# EAGLE board stereo-mix (EAGLE 9.1.0)
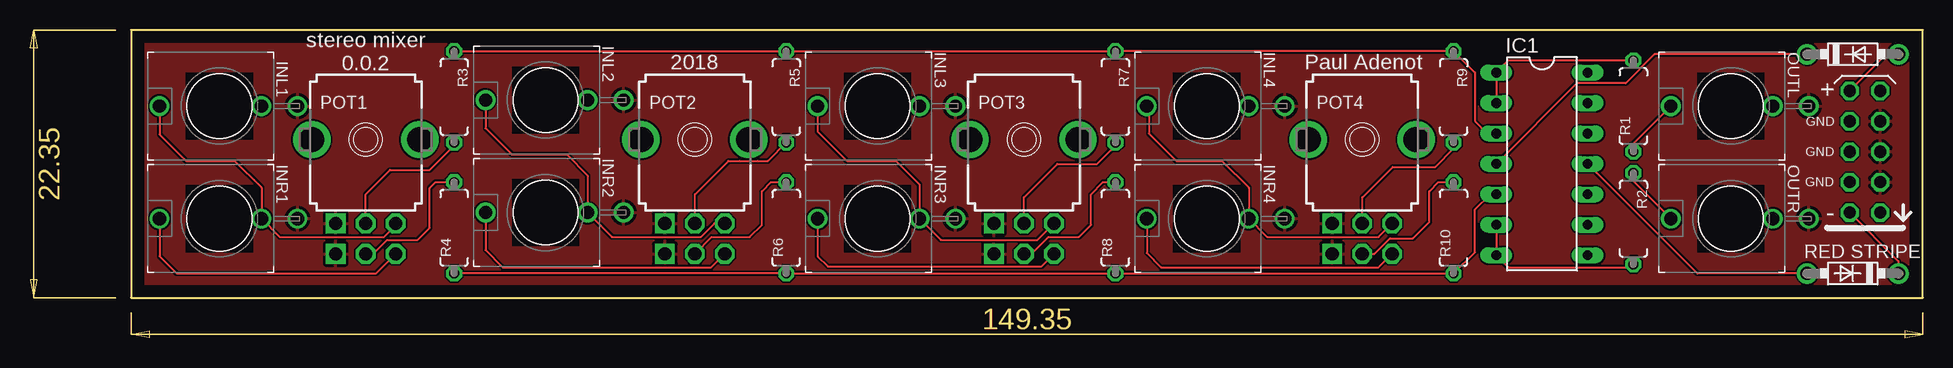
[diagram p0: board, top side]

Size 149.35 x 22.35 mm. Coordinates in mm from the lower left corner, seen from the top.
Outline: 0,0 149.35,0 149.35,22.35 0,22.35 0,0
Copper layers (1*16): Top 0.035mm / dielectric 1.5mm / Bottom 0.035mm
Design rules "default": minimum track width 6mil, minimum drill 0.35mm, track to track 6mil, track to pad 6mil, pad to pad 6mil, via to via 6mil, smd to smd 6mil, copper to edge 40mil, drill to drill 6mil, minimum pad ring 10mil, minimum via ring 8mil, stop-mask expansion 4mil, vias tented up to drill 0mil, thermal gap 10mil

## Footprints (pad centres in the part's own frame; a part is rotated, then mirrored left to right if it is on the bottom)
DO41-7.6 = drill 1.1 pad 1.7: A 3.81,0; C -3.81,0
DIL14 = drill 0.813 long: 1 -7.62,-3.81; 2 -5.08,-3.81; 3 -2.54,-3.81; 4 0,-3.81; 5 2.54,-3.81; 6 5.08,-3.81; 7 7.62,-3.81; 8 7.62,3.81; 9 5.08,3.81; 10 2.54,3.81; 11 0,3.81; 12 -2.54,3.81; 13 -5.08,3.81; 14 -7.62,3.81
WQP-PJ301M-12_JACK = drill 1.1: P$1_TIP 0,5; P$2_SWITCH 0,-3.5; P$3_SLEEVE 0,-6.5
DUAL_9MM_SNAP-IN_POT = drill 1.1 square: 1 -2.5,-7; 1B -2.5,-9.54 | drill 1.1 octagon: 2 0,-7; 2B 0,-9.54; 3 2.5,-7; 3B 2.5,-9.54 | drill 2.1 pad 2.54: CHASSIS1 -4.5,0; CHASSIS2 4.5,0
7MM_RESISTOR = drill 0.813 octagon: 1 -3.81,0; 2 3.81,0
EURO_POWER_HEADER = drill 1.016 octagon: 1 -5.08,-1.27; 2 -5.08,1.27; 3 -2.54,-1.27; 4 -2.54,1.27; 5 0,-1.27; 6 0,1.27; 7 2.54,-1.27; 8 2.54,1.27; 9 5.08,-1.27; 10 5.08,1.27

## Placement (x,y rotation side)
D1  [DO41-7.6]  143.51,20.32 0 top
D2  [DO41-7.6]  143.51,2.03 180 top
IC1  [DIL14]  117.6,11.18 270 top
INL1  THONKICONNNEW  [WQP-PJ301M-12_JACK]  7.37,16 90 top
INL2  THONKICONNNEW  [WQP-PJ301M-12_JACK]  34.54,16.51 90 top
INL3  THONKICONNNEW  [WQP-PJ301M-12_JACK]  62.23,16 90 top
INL4  THONKICONNNEW  [WQP-PJ301M-12_JACK]  89.66,16 90 top
INR1  THONKICONNNEW  [WQP-PJ301M-12_JACK]  7.37,6.6 90 top
INR2  THONKICONNNEW  [WQP-PJ301M-12_JACK]  34.54,7.11 90 top
INR3  THONKICONNNEW  [WQP-PJ301M-12_JACK]  62.23,6.6 90 top
INR4  THONKICONNNEW  [WQP-PJ301M-12_JACK]  89.66,6.6 90 top
OUTL  THONKICONNNEW  [WQP-PJ301M-12_JACK]  133.35,16 90 top
OUTR  THONKICONNNEW  [WQP-PJ301M-12_JACK]  133.35,6.6 90 top
POT1  10k  [DUAL_9MM_SNAP-IN_POT]  19.56,13.21 0 top
POT2  10k  [DUAL_9MM_SNAP-IN_POT]  46.99,13.21 0 top
POT3  10k  [DUAL_9MM_SNAP-IN_POT]  74.42,13.21 0 top
POT4  10k  [DUAL_9MM_SNAP-IN_POT]  102.62,13.21 0 top
R1  1k  [7MM_RESISTOR]  125.22,16 90 top
R2  1k  [7MM_RESISTOR]  125.22,6.6 270 top
R3  1k  [7MM_RESISTOR]  26.92,16.76 270 top
R4  1k  [7MM_RESISTOR]  26.92,5.84 90 top
R5  1k  [7MM_RESISTOR]  54.61,16.76 270 top
R6  1k  [7MM_RESISTOR]  54.61,5.84 90 top
R7  1k  [7MM_RESISTOR]  82.04,16.76 270 top
R8  1k  [7MM_RESISTOR]  82.04,5.84 90 top
R9  1k  [7MM_RESISTOR]  110.24,16.76 270 top
R10  1k  [7MM_RESISTOR]  110.24,5.84 90 top
SV1  EURO_POWER_HEADERREGULAR  [EURO_POWER_HEADER]  144.53,12.19 90 top

## Library data of the parts
D1 D2 = diode
IC1 = linear
INL1-INL4 INR1-INR4 OUTL OUTR POT1-POT4 R1-R10 SV1 = MusicThingModular

## Nets
GND: INL1.P$3_SLEEVE INL2.P$3_SLEEVE INL3.P$3_SLEEVE INL4.P$3_SLEEVE INR1.P$3_SLEEVE INR2.P$3_SLEEVE INR3.P$3_SLEEVE INR4.P$3_SLEEVE OUTL.P$3_SLEEVE OUTR.P$3_SLEEVE POT1.1 POT1.1B POT2.1 POT2.1B POT3.1 POT3.1B POT4.1 POT4.1B SV1.3 SV1.5 SV1.7
N$1: POT1.2B R4.2
N$2: POT1.2 R3.2
N$3: POT2.2 R5.2
N$4: POT2.2B R6.2
N$5: POT3.2 R7.2
N$6: OUTL.P$1_TIP R1.1
N$7: POT3.2B R8.2
N$8: POT4.2 R9.2
N$9: POT4.2B R10.2
N$10: D2.C SV1.2
N$11: INR1.P$1_TIP POT1.3B
N$12: INL2.P$1_TIP INR2.P$2_SWITCH POT2.3
N$13: INR2.P$1_TIP POT2.3B
N$14: D1.A SV1.10
N$15: INR3.P$1_TIP POT3.3B
N$18: INR4.P$1_TIP POT4.3B
N$20: OUTR.P$1_TIP R2.1
N$25: INL1.P$1_TIP INR1.P$2_SWITCH POT1.3
N$27: IC1.6 IC1.7 R2.2
N$29: IC1.1 IC1.2 R1.2
N$40: INL3.P$1_TIP INR3.P$2_SWITCH POT3.3
N$45: INL4.P$1_TIP INR4.P$2_SWITCH POT4.3
N$47: IC1.3 R3.1 R5.1 R7.1 R9.1
N$48: IC1.5 R4.1 R6.1 R8.1 R10.1
VCC: D1.C IC1.4
VEE: D2.A IC1.11

## Tracks (layer width: path | path; a pad name or v marks a point on that pad's centre or on a via)
GND
  pour Top: 0,22.35 0,0.25 149.35,0.25 149.35,22.35
N$1
  Top 0.152: POT1.2B 20.18,3.67 21.34,4.83 23.88,4.83 24.89,5.84 24.89,9.14 25.4,9.65 R4.2
N$2
  Top 0.152: POT1.2 19.56,8.64 21.59,10.67 24.89,10.67 26.92,12.7 R3.2
N$3
  Top 0.152: POT2.2 46.99,8.64 49.78,11.43 50.74,11.43 50.75,11.42 52.23,11.42 52.24,11.43 53.09,11.43 R5.2
N$4
  Top 0.152: POT2.2B 48.4,5.08 51.56,5.08 52.58,6.1 52.58,8.89 53.34,9.65 R6.2
N$5
  Top 0.152: POT3.2 74.42,8.38 77.22,11.18 80.52,11.18 82.04,12.7 R7.2
N$6
  Top 0.152: R1.1 125.22,12.87 OUTL.P$1_TIP
N$7
  Top 0.152: POT3.2B 75.04,3.67 76.45,5.08 78.99,5.08 80.01,6.1 80.01,8.64 81.03,9.65 R8.2
N$8
  Top 0.152: POT4.2 102.62,8.38 105.16,10.92 108.71,10.92 110.24,12.45 R9.2
N$9
  Top 0.152: POT4.2B 103.63,3.67 104.93,4.98 106.83,4.98 108.2,6.35 108.2,8.89 108.97,9.65 R10.2
N$10
  Top 0.152: SV1.2 147.32,3.05 D2.C
N$11
  Top 0.152: INR1.P$1_TIP 2.37,3.48 3.81,2.03 20.42,2.03 POT1.3B
N$12
  Top 0.152: INL2.P$1_TIP 29.54,14.14 31.75,11.94 36.32,11.94 38.04,10.22 INR2.P$2_SWITCH 40.08,5.08 47.5,5.08 48.63,6.21 POT2.3
N$13
  Top 0.152: INR2.P$1_TIP 29.54,3.98 30.99,2.54 48.36,2.54 POT2.3B
N$14
  Top 0.152: SV1.10 146.3,20.32 D1.A
N$15
  Top 0.152: INR3.P$1_TIP 57.23,3.48 58.09,2.61 75.87,2.61 POT3.3B
N$18
  Top 0.152: INR4.P$1_TIP 84.66,3.73 85.85,2.54 103.99,2.54 POT4.3B
N$20
  Top 0.152: R2.1 125.22,9.73 OUTR.P$1_TIP
N$25
  Top 0.152: POT1.3 22.06,6.06 21.08,5.08 12.39,5.08 INR1.P$2_SWITCH 10.87,9.2 8.64,11.43 4.57,11.43 2.37,13.64 INL1.P$1_TIP
N$27
  Top 0.152: IC1.6 IC1.7 114.81,2.54 124.97,2.54 R2.2
N$29
  Top 0.152: IC1.2 IC1.1 114.81,19.81 R1.2
N$40
  Top 0.152: INL3.P$1_TIP 57.23,13.89 59.69,11.43 63.75,11.43 65.73,9.45 INR3.P$2_SWITCH 67.51,4.83 75.54,4.83 POT3.3
N$45
  Top 0.152: INL4.P$1_TIP 84.84,15.83 84.84,13.72 87.12,11.43 90.93,11.43 93.16,9.2 INR4.P$2_SWITCH 94.69,5.08 103.99,5.08 POT4.3
N$47
  Top 0.152: R3.1 R5.1 R7.1 R9.1 112.01,18.8 112.01,14.73 113.03,13.72 IC1.3
N$48
  Top 0.152: R4.1 R6.1 R8.1 R10.1 112.01,3.81 112.01,7.37 113.28,8.64 IC1.5
VCC
  Top 0.152: IC1.4 120.52,17.91 124.57,17.91 126.99,20.32 D1.C
VEE
  Top 0.152: D2.A 130.56,2.03 IC1.11

## Text on the board
tPlace: stereo mixer / 0.0.2 | 2018 | Paul Adenot